# EAGLE board Nusbio1.0.WaveShare.I2C.LCD (EAGLE 9.6.2)

Size 40.05 x 94 mm. Coordinates in mm from the lower left corner, seen from the top.
Outline: 4,0 0,0 0,4
Outline: 29,0 34,0 40,4
Outline: 40,91 39,93 38,94
Outline: 2,94 0,92
Outline: 0,92 arc-90 2,94
Outline: 2,94 38,94
Outline: 38,94 arc-90 40,91
Outline: 40,91 40,4
Outline: 40,4 arc-90 36,0 29,0
Outline: 29,0 4,0
Outline: 4,0 arc-90 0,4
Outline: 0,4 0,92
Copper layers (1*16): Top 0.035mm / dielectric 1.5mm / Bottom 0.035mm
Design rules "default": minimum track width 10mil, minimum drill 24mil, track to track 8mil, track to pad 8mil, pad to pad 8mil, via to via 8mil, smd to smd 8mil, copper to edge 40mil, drill to drill 8mil, minimum pad ring 10mil, minimum via ring 8mil, stop-mask expansion 4mil, vias tented up to drill 0mil, thermal gap 10mil
Holes 3.2 mm at 6,3.5 34,3.5 6,31.5 34,31.5 33,51 6,52

## Footprints (pad centres in the part's own frame; a part is rotated, then mirrored left to right if it is on the bottom)
1X05 = drill 1.016 long: 1 -5.08,0; 2 -2.54,0; 3 0,0; 4 2.54,0; 5 5.08,0
1X06 = drill 1.016 octagon: 1 -6.35,0; 2 -3.81,0; 3 -1.27,0; 4 1.27,0; 5 3.81,0; 6 6.35,0
1206 = smd 1.6 x 1.803: A -1.422,0; C 1.422,0
SIP10 = drill 0.6 long: 1 -11.46,0; 2 -8.92,0; 3 -6.38,0; 4 -3.84,0; 5 -1.3,0; 6 1.24,0; 7 3.78,0; 8 6.32,0; 9 8.86,0; 10 11.4,0
R1206 = smd 1.6 x 1.803: 1 -1.422,0; 2 1.422,0
1X10-BIG = drill 1.016 pad 1.778 octagon: 1 -11.43,0; 2 -8.89,0; 3 -6.35,0; 4 -3.81,0; 5 -1.27,0; 6 1.27,0; 7 3.81,0; 8 6.35,0; 9 8.89,0; 10 11.43,0

## Placement (x,y rotation side)
CBUS_PINS  [1X05]  28,8 90 top
F_HEADER  [1X06]  20,38 180 top
L_HEADER  [1X05]  12,8 90 top
LED0  [1206]  31.5,74.5 270 top
LED1  [1206]  29,74.5 270 top
LED2  [1206]  26.5,74.5 270 top
LED3  [1206]  24,74.5 270 top
LED4  [1206]  21.5,74.5 270 top
LED5  [1206]  19,74.5 270 top
LED6  [1206]  16.5,74.5 270 top
LED7  [1206]  14,74.5 270 top
LPOWER  [1206]  36,74.5 270 top
RN1  [SIP10]  37,54 270 top
RPWR_470_O  [R1206]  20,64 180 top
U$1  PINHD-1X10  [1X10-BIG]  20,81 180 top

## Library data of the parts
CBUS_PINS L_HEADER = pinhead
F_HEADER LED0 LED1-LED7 LPOWER RPWR_470_O U$1 = adafruit
RN1 = resistor-sip

## Nets
CTS_G4: F_HEADER.6 LED4.A U$1.5
DCD_G3: L_HEADER.2 LED3.A U$1.4
DSR_G1: L_HEADER.3 LED1.A U$1.2
DTR_G2: L_HEADER.5 LED2.A U$1.3
GND: F_HEADER.2 RN1.1 RPWR_470_O.2 U$1.10
N$1: LED1.C RN1.3
N$2: LED0.C RN1.2
N$3: LED2.C RN1.4
N$4: LED3.C RN1.5
N$5: LED4.C RN1.6
N$6: LED7.C RN1.9
N$7: LED5.C RN1.7
N$8: LED6.C RN1.8
N$9: LPOWER.C RPWR_470_O.1
NUSBIO_VCC: F_HEADER.1 LPOWER.A U$1.9
RESET: L_HEADER.1
RI_G0: L_HEADER.4 LED0.A U$1.1
RTS_G7: F_HEADER.5 LED7.A U$1.8
RX_G6: F_HEADER.4 LED6.A U$1.7
TX_G5: F_HEADER.3 LED5.A U$1.6

## Tracks (layer width: path | path; a pad name or v marks a point on that pad's centre or on a via)
CTS_G4  (2 unrouted)
DCD_G3  (2 unrouted)
DSR_G1  (2 unrouted)
DTR_G2  (2 unrouted)
GND  (3 unrouted)
N$1  (1 unrouted)
N$2  (1 unrouted)
N$3  (1 unrouted)
N$4  (1 unrouted)
N$5  (1 unrouted)
N$6  (1 unrouted)
N$7  (1 unrouted)
N$8  (1 unrouted)
N$9  (1 unrouted)
NUSBIO_VCC  (2 unrouted)
RI_G0  (2 unrouted)
RTS_G7  (2 unrouted)
RX_G6  (2 unrouted)
TX_G5  (2 unrouted)

## Text on the board
tNames: GND | VCC | 7 | 6 | 5 | 4 | 3 | 2 | 1 | 0 | + | v1.0 /Seeed 2019 | Nusbio | Nusbio | MadeInTheUSB.net
bNames: NUSBIO / v1.0 /Seeed 2019 FT-2019-07 | MadeInTheUSB.net